# Altium PCB ClimaSens-Touch.PcbDoc
Units mm, origin at the board's own origin, x right, y up, seen from the top; angles counter-clockwise.
Board outline 24.92 x 30 mm, 2 copper layers (Top Layer, Bottom Layer); 7 components, 8 nets, 40 pads, 6 vias.
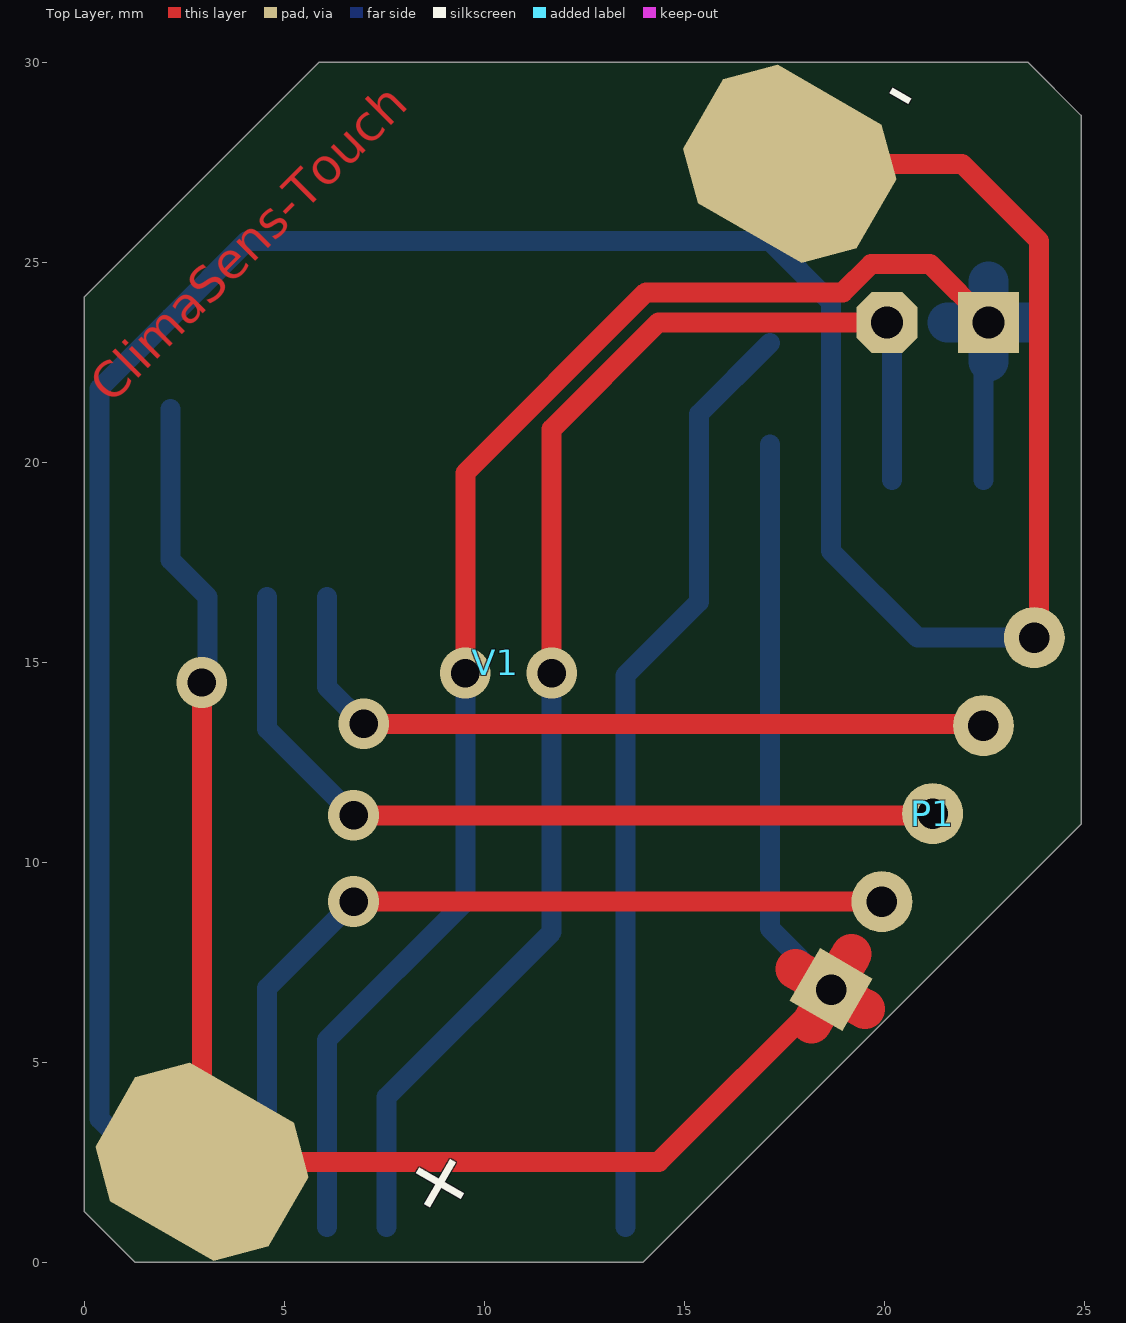
[diagram p0: Top Layer view]
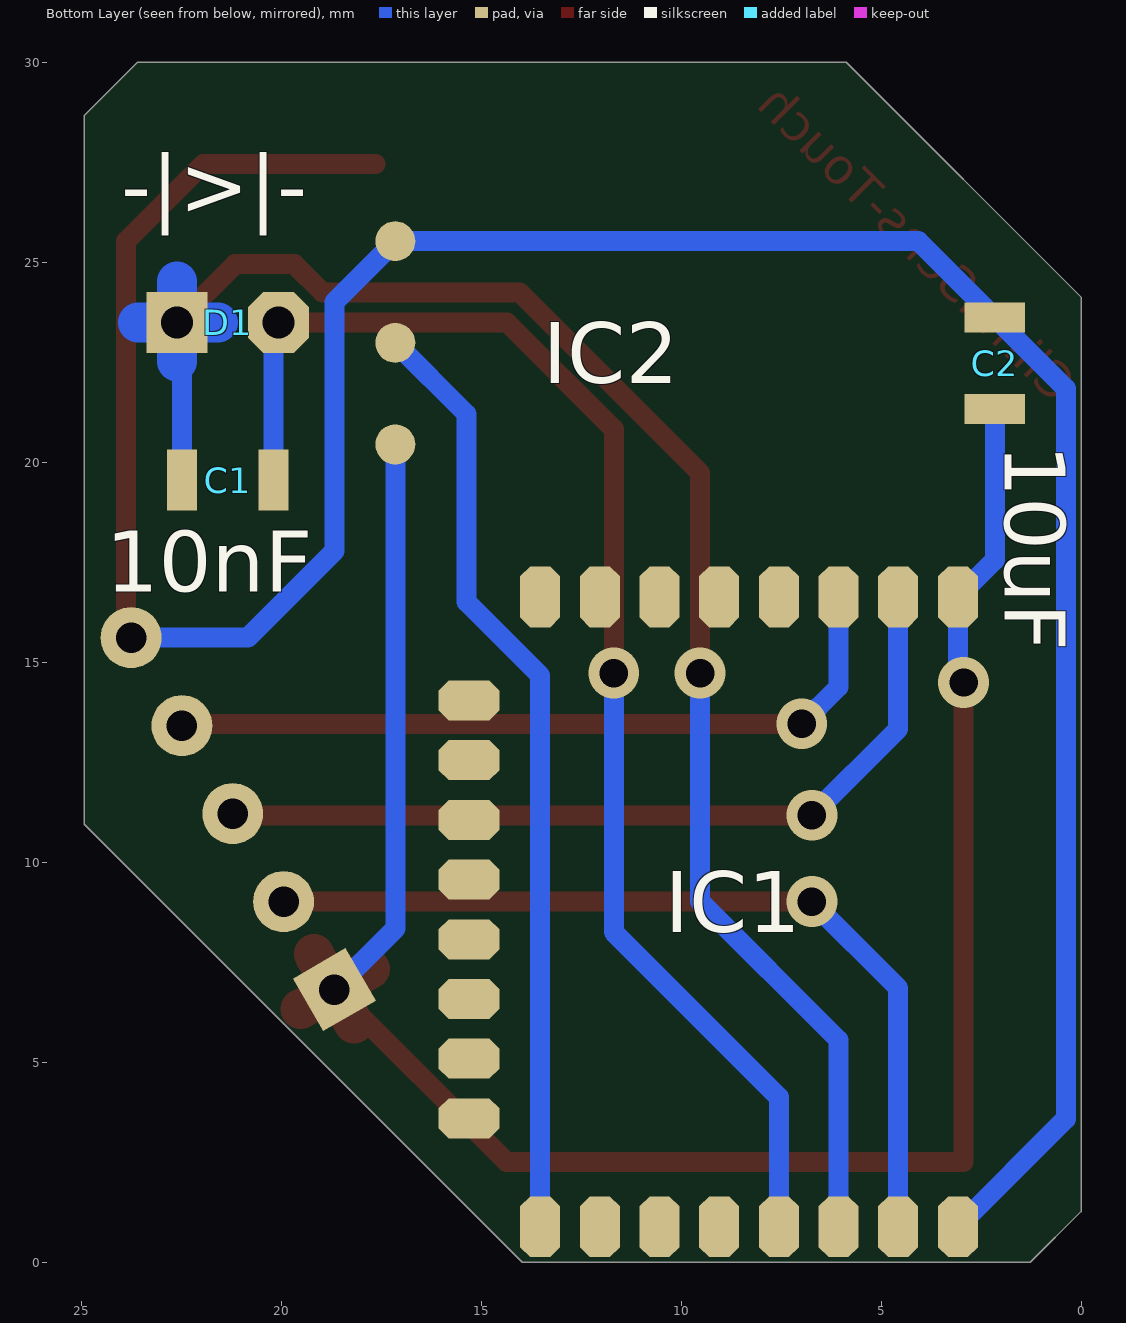
[diagram p1: Bottom Layer view, seen from below]

## Layer stack, top to bottom
Top Solder: solder mask 0.0102, Solder Resist, Dk 3.5
Top Layer: signal copper 0.0356
Dielectric 1: dielectric 0.32, FR-4, Dk 4.8
Bottom Layer: signal copper 0.0356
Bottom Solder: solder mask 0.0102, Solder Resist, Dk 3.5

## Board outline
0,1.27 1.27,0 13.97,0 24.92,10.95 24.92,28.674 23.594,30 5.87,30 0,24.13

## Design rules (kind name [scope] priority, off if disabled: settings)
Clearance [All] p1: gap=0.254 ignorepadtopadclearanceinfootprint=FALSE except(0: Arc-Hole Track-Hole SMDPad-Hole THPad-Hole Via-Hole Fill-Hole Poly-Hole Region-Hole Text-Hole)
PolygonConnect [All] p1: connectstyle=Relief reliefconductorwidth=0.254 reliefentries=4 polygonreliefangle="90 Angle" airgapwidth=0.254
RoutingVias [All] p1: holewidth=0.711 width=1.27 viastyle="Through Hole" minholewidth=0.711 minwidth=1.27 maxholewidth=0.711 maxwidth=1.27
SolderMaskExpansion [All] p1: expansion=0.102
Width [All] p1: maxlimit=1 minlimit=0.1 preferedwidth=0.5 minimp=50.000000 maximp=50.000000 favimp=50.000000
30 further rules are at their usual default settings.

## Classes and differential pairs
component class ClimaSens-Touch: C1 C2 D1 IC1 IC2 P1

## Components (designator, comment, footprint, x,y, rotation, side; value= is the part's Value field where it differs from the comment)
C1 "10nF" 0805 21.336,19.558 r180 bottom
C2 "10uF" 0805 2.159,22.479 r90 bottom
D1 "LED" "LED 3mm" 21.336,23.495 r180 bottom
IC1 "JDY-08 CC2541" "JDY-08 CC2541" -5.018,1.27 r90 bottom
IC2 "Touch" Touch 4.145,28.237 r0 bottom
P1 "Vcc" ProgramPort 18.669,6.817 r60 top
V1 "Vcc" Battery-Clip 10.287,14.986 r60 top

## Footprints (in the part's own frame and the unit in brackets; to place one, negate y for a bottom-side part, rotate by r counter-clockwise, add the part's x,y. Pads: shape width x height; smd on the part's side, far side on the other; paste and mask are expansions set on the pad)
0805 [mil]
  rect 29.53x60 smd: 1(-45,0) 2(45,0)
  body extent -40,-24 39,25, height 39
Battery-Clip [mm]
  oct 4x5 smd: 1(-14.478,0.127) 2(14.478,-0.127)
  body extent -14.5,-10 14.5,10, height 5.5
"JDY-08 CC2541" [mil]
  oct 60x39.37 smd: 1(605,318.82) 2(605,377.56) 3(605,436.3) 4(605,495.04) 5(605,553.78) 6(605,612.52) 7(605,671.26) 8(605,730) 17(-15,318.82) 18(-15,377.56) 19(-15,436.3) 20(-15,495.04) 21(-15,553.78) 22(-15,612.52) 23(-15,671.26) 24(-15,730)
  oct 39.37x60 smd: 9(502.91,800) 10(444.17,800) 11(385.43,800) 12(326.69,800) 13(267.95,800) 14(209.21,800) 15(150.47,800) 16(91.73,800)
  body extent 0,0 591,787, height 79
"LED 3mm" [mil]
  rect 60x60 hole 31.5: 1(-50,0)
  oct 60x60 hole 31.5: 2(50,0)
  Top Layer lines w39.37: -9.68,0 -50,0 ; -50,-38.43 -50,0 ; -50,40.32 -50,0 ; -88.43,0 -50,0
  body extent -79,-79 79,79, height 217
ProgramPort [mil]
  rect 60x60 hole 30: 1(0,0)
  round 60 hole 30: 2(100,0) 3(200,0) 4(300,0) 5(400,0)
  Top Layer lines w39.37: 0,40.31 0,0 ; -38.43,0 0,0 ; 40.31,0 0,0 ; 0,-38.43 0,0 ; 0,0 0,0 ; 0,0 0,0
Touch [mm]
  round 1 smd: 1(13,2.71) 2(13,5.25) 3(13,7.79)
  body extent 0,0 14.5,10.5, height 3

## Part data
C1 C2: library part Capacitator
P1: library part ProgramPort
V1: library part "Battery Clip"

## Via types
v1: diameter 1.27, hole 0.711, Top Layer to Bottom Layer, tented both sides, 6 vias

## Nets (pads, with @x,y where several pads share a name; then routed paths per layer and width w, separated by ;. In a path a pad name is that pad's centre, name@x,y a point inside that pad or via, vN(x,y) a via of type N, cw(c..) or ccw(c..) an arc to the next point about the centre after c; other vN are vias at no path point)
GND: C2.2 IC1.17 IC2.1 P1.5 V1.2 | length 71.8
  Top Layer w0.5: V1.2 21.942,27.461 23.872,25.531 23.872,15.616 P1.5
  Bottom Layer w0.5: IC1.17 0.381,3.588 0.381,21.844 C2.2 4.064,25.527 IC2.1 18.669,24.003 18.669,17.78 20.833,15.616 P1.5
NetC1_1: C1.1 D1.1 IC1.19 | length 40.1
  Top Layer w0.5: v1(9.525,14.732) 9.525,19.735 14.039,24.249 18.964,24.249 19.669,24.954 21.147,24.954 D1.1
  Bottom Layer w0.5: IC1.19 6.064,5.556 9.525,9.017 v1(9.525,14.732) ; C1.1 22.479,23.368 D1.1
NetC1_2: C1.2 D1.2 IC1.20 | length 35.1
  Top Layer w0.5: v1(11.684,14.732) 11.684,20.828 14.351,23.495 D1.2
  Bottom Layer w0.5: IC1.20 7.556,4.127 11.684,8.255 v1(11.684,14.732) ; D1.2 20.193,23.368 C1.2
NetIC1_2: IC1.2 P1.3 | length 20.9
  Top Layer w0.5: v1(6.731,11.176) 21.168,11.176 P1.3
  Bottom Layer w0.5: IC1.2 4.572,13.335 v1(6.731,11.176)
NetIC1_3: IC1.3 P1.4 | length 19.1
  Top Layer w0.5: v1(6.985,13.462) 22.433,13.462 P1.4
  Bottom Layer w0.5: IC1.3 6.064,14.383 v1(6.985,13.462)
NetIC1_18: IC1.18 P1.2 | length 22.2
  Top Layer w0.5: v1(6.731,9.017) P1.2
  Bottom Layer w0.5: IC1.18 4.572,6.858 v1(6.731,9.017)
NetIC1_24: IC1.24 IC2.2 | length 23.6
  Bottom Layer w0.5: IC1.24 13.524,14.67 15.367,16.513 15.367,21.209 IC2.2
Vcc: C2.1 IC1.1 IC2.3 P1.1 V1.1 | length 51
  Top Layer w0.5: v1(2.938,14.495) V1.1 14.363,2.511 P1.1
  Bottom Layer w0.5: C2.1 2.159,17.558 IC1.1 3.08,14.637 v1(2.938,14.495) ; IC2.3 17.145,8.341 P1.1
pads on no net: IC1.4 IC1.5 IC1.6 IC1.7 IC1.8 IC1.9 IC1.10 IC1.11 IC1.12 IC1.13 IC1.14 IC1.15 IC1.16 IC1.21 IC1.22 IC1.23

## Other copper
Top Layer:
  text "ClimaSens-Touch" at 0.889,21.209 h1.52 r45

## Silkscreen, mask and mechanical layers (free items; w line width, h text height)
Top Solder:
  text "ClimaSens-Touch" at 0.889,21.209 h1.52 r45
Mechanical 1:
  circle w0.1: c-1.397,6.604 r2.159
  circle w0.1: c21.336,23.495 r2.159
  lines w0.1: -5.08,29.972 -5.08,19.05 ; -5.052,30 5.87,30 ; 0,1.27 0,0 ; 0,24.13 -5.08,19.05 ; 1.27,0 0,0 ; 13.97,0 24.892,0 24.92,0.028 24.92,10.95 ; 23.594,30 24.92,30 24.92,28.674 ; -5.08,19.05 -5.08,0 0,0
Mechanical 2:
  the board outline again, w0.1

## Text inside footprints (layer, text, board x,y; h text height)
D1: Bottom Overlay "-|>|-" at 24.003,26.162 h1.52
V1: Top Overlay "-" at 19.795,28.858 h1.52 r330; Top Overlay "+" at 9.017,0.889 h1.52 r60